# EAGLE board DCDCDC-R2 (EAGLE 9.1.3)
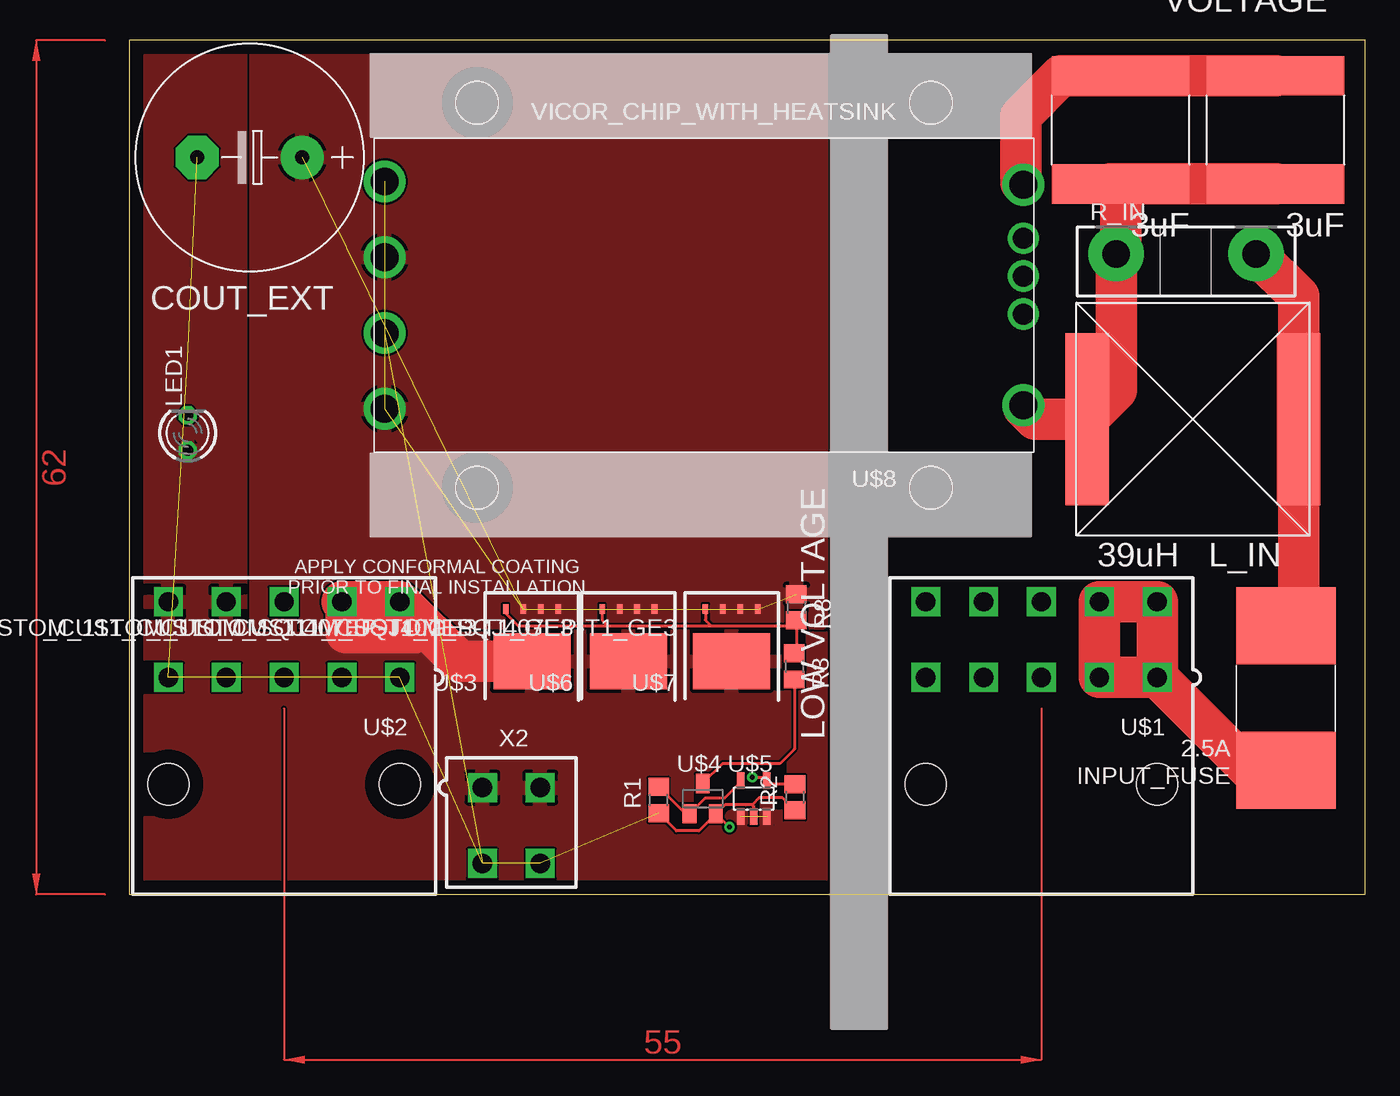
[diagram p0: board, top side]
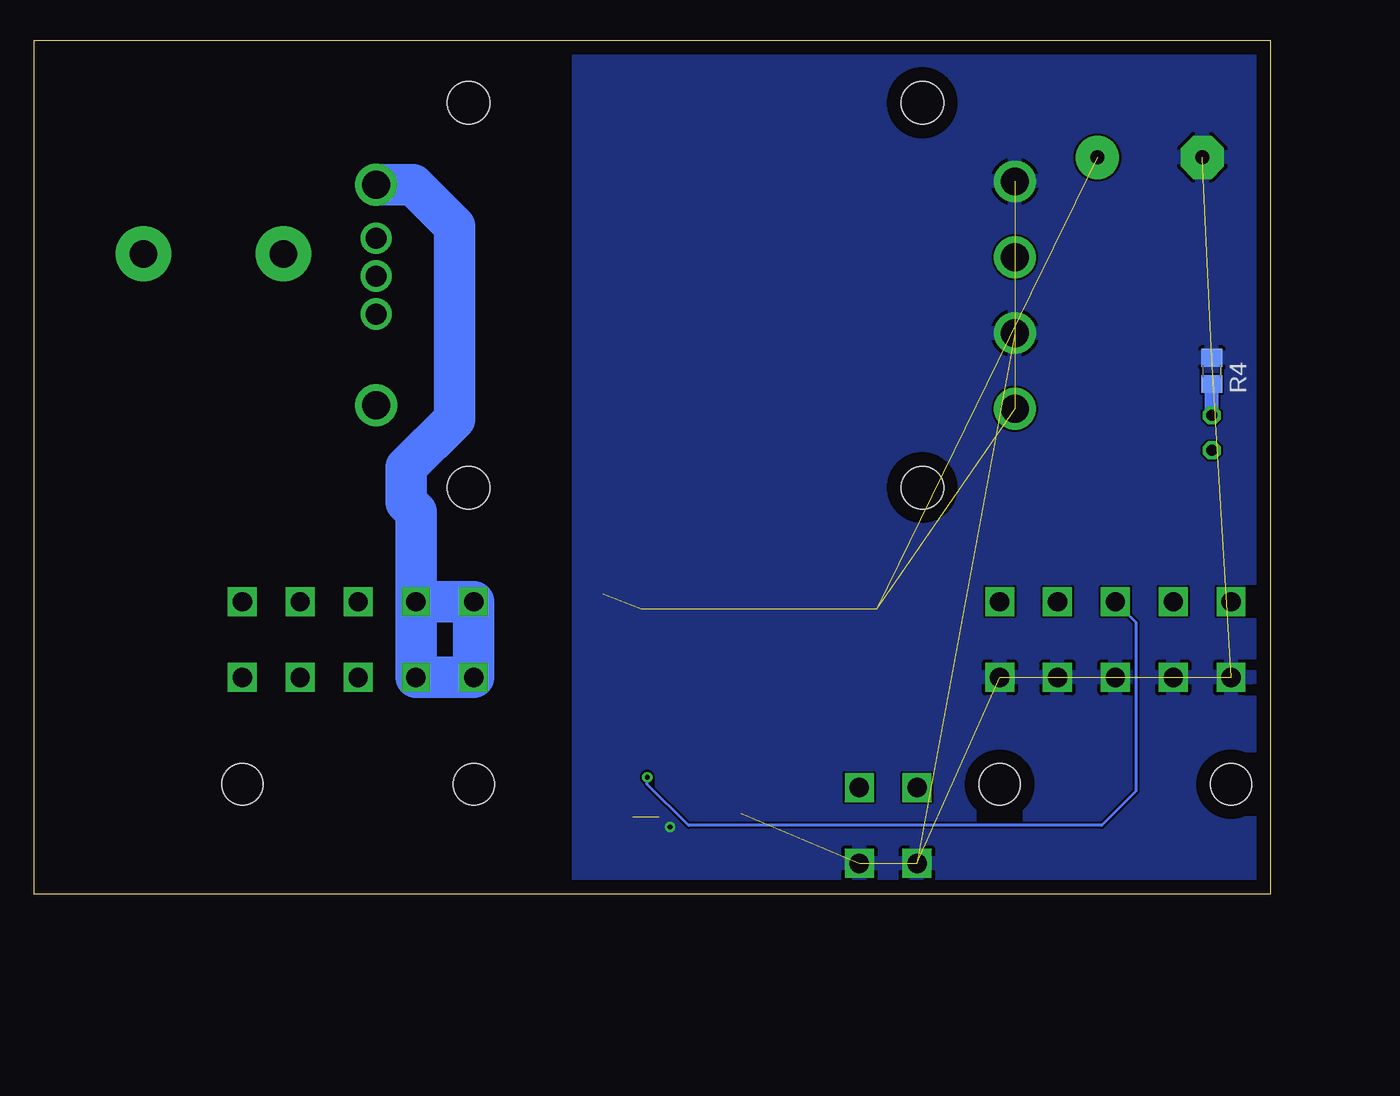
[diagram p1: board, bottom side, seen from below]

Size 89.75 x 62 mm. Coordinates in mm from the lower left corner, seen from the top.
Outline: 89.75,62 0,62 0,0 89.75,0 89.75,62
Copper layers (1*16): Top 0.035mm / dielectric 1.5mm / Bottom 0.035mm
Design rules "default": minimum track width 6mil, minimum drill 0.35mm, track to track 6mil, track to pad 6mil, pad to pad 6mil, via to via 6mil, smd to smd 6mil, copper to edge 40mil, drill to drill 6mil, minimum pad ring 10mil, minimum via ring 8mil, stop-mask expansion 4mil, vias tented up to drill 0mil, thermal gap 10mil
Net classes: 0 default: width 1 mm, clearance 0.152 mm; 1 LV: clearance 0.001 mm

## Footprints (pad centres in the part's own frame; a part is rotated, then mirrored left to right if it is on the bottom)
CERALINK_FA3 = smd 2.85 x 10: P$1 -3.925,0; P$2 3.925,0
E7,5-16 = drill 1.016 pad 3.15: + -3.81,0 | drill 1.016 pad 3.15 octagon: - 3.81,0
_CUSTOM_PARTS_LF_885 = smd 5.6 x 7.23: P$1 5.25,0; P$2 -5.25,0
L_1510_NONSTANDARD = smd 3.15 x 12.5: P$1 -7.675,0; P$2 7.675,0
LED3MM = drill 0.813 octagon: A -1.27,0; K 1.27,0
R0805 = smd 1.3 x 1.5: 1 -0.95,0; 2 0.95,0
TO-247-2V = drill 2 pad 4: 1 -5.08,0; 2 5.08,0
15-24-6100 = drill 1.4 square: 1 8.4,-2.75; 2 4.2,-2.75; 3 0,-2.75; 4 -4.2,-2.75; 5 -8.4,-2.75; 6 8.4,2.75; 7 4.2,2.75; 8 0,2.75; 9 -4.2,2.75; 10 -8.4,2.75 | hole 3: 8.4,-10.5; -8.4,-10.5
_CUSTOM_111_CUSTOM_TRANS_SIRA90DP-T1-GE3 = smd 0.41 x 0.72: 1 -1.905,-2.715; 2 -0.635,-2.715; 3 0.635,-2.715; 4 1.905,-2.715 | smd 5.588 x 4.064: 5 0,1.08
SOT23 = smd 1 x 1.4: 1 -0.95,-1.1; 2 0.95,-1.1; 3 0,1.1
SOT23-5L = smd 0.55 x 1.2: 1 -0.95,-1.3; 2 0,-1.3; 3 0.95,-1.3; 4 0.95,1.3; 5 -0.95,1.3
VICOR_CHIP_HEATSINK = drill 1.52 pad 1.77: EN -23.19,-1.38; FT -23.19,-4.13; TR -23.19,1.38 | drill 2.03 pad 2.28: IN+ -23.19,8; IN- -23.19,-8 | drill 2.03 pad 2.41: OUT+_1 23.19,8.25; OUT+_2 23.19,-2.75; OUT-_1 23.19,2.75; OUT-_2 23.19,-8.25 | hole 3.1: -16.47,13.97; -16.47,-13.97; 16.47,13.97; 16.47,-13.97
7792 = hole 1.9: 0,5; 0,0; 7.5,0; 7.5,5
5566-4 = drill 1.4 square: 1 2.1,-2.75; 2 -2.1,-2.75; 3 2.1,2.75; 4 -2.1,2.75

## Placement (x,y rotation side)
CFILTER_1  3uF  [CERALINK_FA3]  83.25,55.5 90 top
CFILTER_2  3uF  [CERALINK_FA3]  72,55.5 90 top
COUT_EXT  [E7,5-16]  8.75,53.5 180 top
INPUT_FUSE  2.5A  [_CUSTOM_PARTS_LF_885]  84,14.25 270 top
L_IN  39uH  [L_1510_NONSTANDARD]  77.25,34.5 180 top
LED1  [LED3MM]  4.25,33.5 90 top
R1  [R0805]  38.45,6.85 90 top
R2  [R0805]  48.35,7.05 90 top
R3  [R0805]  48.3,16.55 270 top
R4  [R0805]  4.25,38 270 bottom
R8  [R0805]  48.45,20.85 270 top
R_IN  2.5  [TO-247-2V]  76.75,46.5 180 top
U$1  15-24-6100  [15-24-6100]  66.25,18.5 0 top
U$2  15-24-6100  [15-24-6100]  11.25,18.5 0 top
U$3  _CUSTOM_111_CUSTOM_SQJ407EP-T1_GE3  [_CUSTOM_111_CUSTOM_TRANS_SIRA90DP-T1-GE3]  29.25,18 180 top
U$4  RK7002BMT116  [SOT23]  41.65,6.95 0 top
U$5  UCC27511AQDBVRQ1  [SOT23-5L]  45.35,6.95 0 top
U$6  _CUSTOM_111_CUSTOM_SQJ407EP-T1_GE3  [_CUSTOM_111_CUSTOM_TRANS_SIRA90DP-T1-GE3]  36.25,18 180 top
U$7  _CUSTOM_111_CUSTOM_SQJ407EP-T1_GE3  [_CUSTOM_111_CUSTOM_TRANS_SIRA90DP-T1-GE3]  43.75,18 180 top
U$8  VICOR_CHIP_WITH_HEATSINK  [VICOR_CHIP_HEATSINK]  41.75,43.5 180 top
U$9  7792  [7792]  -34.75,45 0 top  (outside the outline)
U$10  7792  [7792]  97.75,46.5 0 top  (outside the outline)
X2  5566-4  [5566-4]  27.75,5 180 top

## Library data of the parts
CFILTER_1 CFILTER_2 COUT_EXT INPUT_FUSE L_IN LED1 U$1-U$10 = ACC-MB-R0
R1-R4 R8 = ACC-MB-R0; SPICEPREFIX: R
R_IN = ACC-MB-R0; OC_FARNELL: unknown; OC_NEWARK: unknown
X2 = ACC-MB-R0; MF: MOLEX; OC_FARNELL: unknown; OC_NEWARK: unknown

## Nets
+12V [LV]: LED1.A U$2.6 U$2.7 U$2.9 U$2.10 U$3.5 U$5.1 U$5.3 U$6.5 U$7.5 X2.1 X2.2
DCDC_OUT [LV]: COUT_EXT.+ R8.1 U$3.1 U$3.2 U$3.3 U$6.1 U$6.2 U$6.3 U$7.1 U$7.2 U$7.3 U$8.OUT+_1 U$8.OUT+_2
GND [LV]: COUT_EXT.- R1.1 R2.1 R4.1 U$2.1 U$2.2 U$2.3 U$2.4 U$2.5 U$4.2 U$5.2 U$8.OUT-_1 U$8.OUT-_2 X2.3 X2.4
N$1 [LV]: R3.1 R8.2 U$3.4 U$6.4 U$7.4
N$2 [LV]: R1.2 U$4.1 U$5.5
N$3 [LV]: CFILTER_1.P$1 CFILTER_2.P$1 L_IN.P$2 R_IN.2 U$8.IN+
N$4 [LV]: R3.2 U$4.3
N$5: LED1.K R4.2
PRECH_ACTIVE [LV]: R2.2 U$2.8 U$5.4
V+ [LV]: INPUT_FUSE.P$1 U$1.1 U$1.2 U$1.6 U$1.7
V+_FUSED [LV]: INPUT_FUSE.P$2 L_IN.P$1 R_IN.1
V- [LV]: CFILTER_1.P$2 CFILTER_2.P$2 U$1.4 U$1.5 U$1.9 U$1.10 U$8.IN-

## Tracks (layer width: path | path; a pad name or v marks a point on that pad's centre or on a via)
+12V  (1 unrouted)
  Top 0.2: 46.35,5.7 U$5.3
  Top 3: U$3.5 23.98,16.92 U$2.6 U$2.7 15.75,20.95 15.75,19 20.75,19
  pour Top (rank 2): -20.5,-15.15 50.25,-15.15 50.25,19.75 9.25,19.75 9.25,78.75 -20.5,78.75
DCDC_OUT  (12 unrouted)
  pour Top: 50.25,19.7 9.25,19.7 9.25,78.5 50.25,78.5
GND  (via drill 0.35)  (11 unrouted)
  Top 0.2: R2.1 47.45,7 45.75,7 45.25,6.5 | 45.25,6.5 45.35,6.4 U$5.2 | 45.25,6.5 44.78,6.5 44.02,6.5 43.25,6.5 U$4.2 | U$4.2 41.37,4.62 39.73,4.62 R1.1 | U$4.2 43.56,4.89 v43.59,4.89
  pour Bottom: 50.25,-15 -20.5,-15 -20.5,78.75 50.25,78.75
N$1
  Top 0.2: U$3.4 27.34,20.41 28.25,19.5 34.75,19.5 | 34.75,19.5 42.25,19.5 | 42.25,19.5 48.05,19.5 R8.2 48.45,17.65 R3.1 | U$6.4 34.34,19.91 34.75,19.5 | U$7.4 41.84,19.91 42.25,19.5
N$2
  Top 0.2: R1.2 40.4,5.85 U$4.1 41.85,7 43.25,7 44.4,8.15 U$5.5
N$3
  Top 1: 69.36,51.58 71.25,51.58 CFILTER_2.P$1
  Top 2.54: 71.67,51.25 CFILTER_2.P$1
  Top 3: CFILTER_1.P$1 71.25,51.58 | CFILTER_2.P$1 72,46.83 R_IN.2 71.67,36.59 L_IN.P$2 65.79,34.5 64.94,35.35 U$8.IN+
N$4
  Top 0.2: R3.2 48.3,10.55 47.25,9.5 43.1,9.5 U$4.3
N$5
  Bottom 1: LED1.K R4.2
PRECH_ACTIVE  (via drill 0.35)
  Top 0.2: R2.2 46.55,8 U$5.4 46.05,8.5 v45.25,8.5
  Bottom 0.2: v45.25,8.5 45.25,8 42.25,5 12.25,5 9.75,7.5 9.75,19.75 U$2.8
V+
  Top 3: U$1.1 U$1.2 U$1.7 U$1.6 U$1.1 | U$1.1 81.4,9 INPUT_FUSE.P$1
V+_FUSED
  Top 3: R_IN.1 84.92,43.41 L_IN.P$1 84.92,20.43 INPUT_FUSE.P$2
V-
  Top 1: 70.33,59.42 CFILTER_2.P$2
  Top 3: 64.79,56.46 64.75,56.5 | 64.75,56.5 67.67,59.42 CFILTER_2.P$2 CFILTER_1.P$2 | U$8.IN- 64.75,51.69 64.75,56.5
  Bottom 3: U$1.9 U$1.10 U$1.5 U$1.4 U$1.9 | U$1.9 62.05,27.76 62.75,28.46 62.75,31 59.25,34.5 59.25,48.5 62.25,51.5 U$8.IN-
(copper drawn outside any net)
  shapes: Top area x2

## Text on the board
tPlace: HIGH / VOLTAGE | HIGH / VOLTAGE | LOW VOLTAGE | APPLY CONFORMAL COATING / PRIOR TO FINAL INSTALLATION